# Altium PCB buck.PcbDoc
Units mm, origin at the board's own origin, x right, y up, seen from the top; angles counter-clockwise.
Board outline 15 x 15 mm, 2 copper layers (Top Layer, Bottom Layer); 13 components, 8 nets, 30 pads, 16 vias.
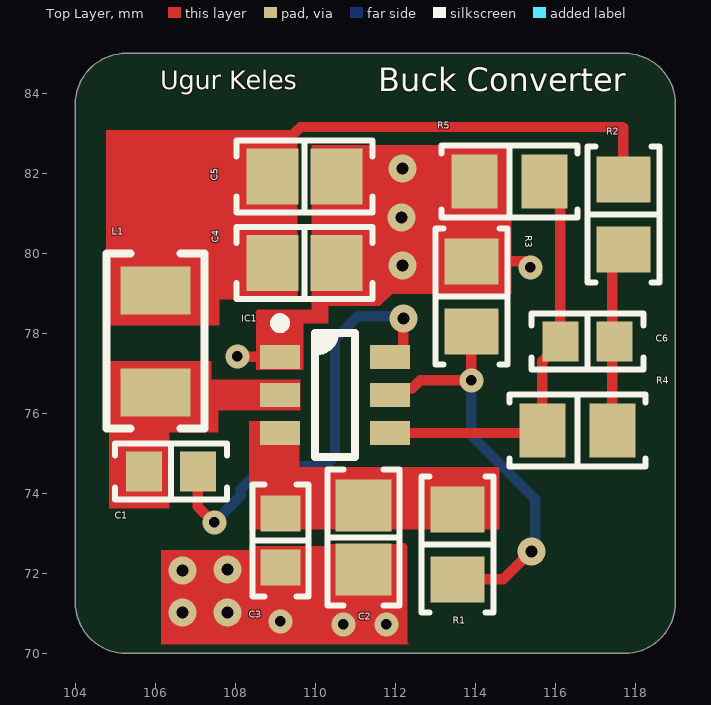
[diagram p0: Top Layer view]
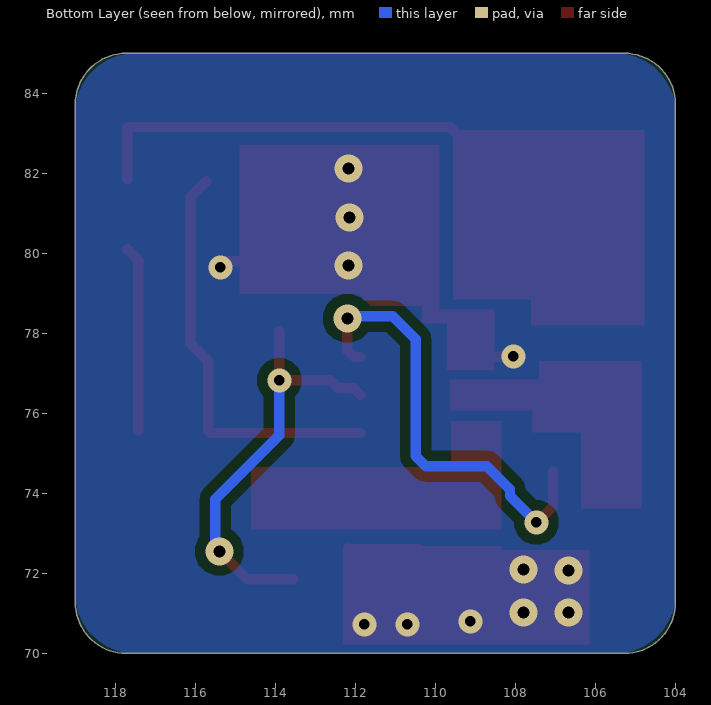
[diagram p1: Bottom Layer view, seen from below]
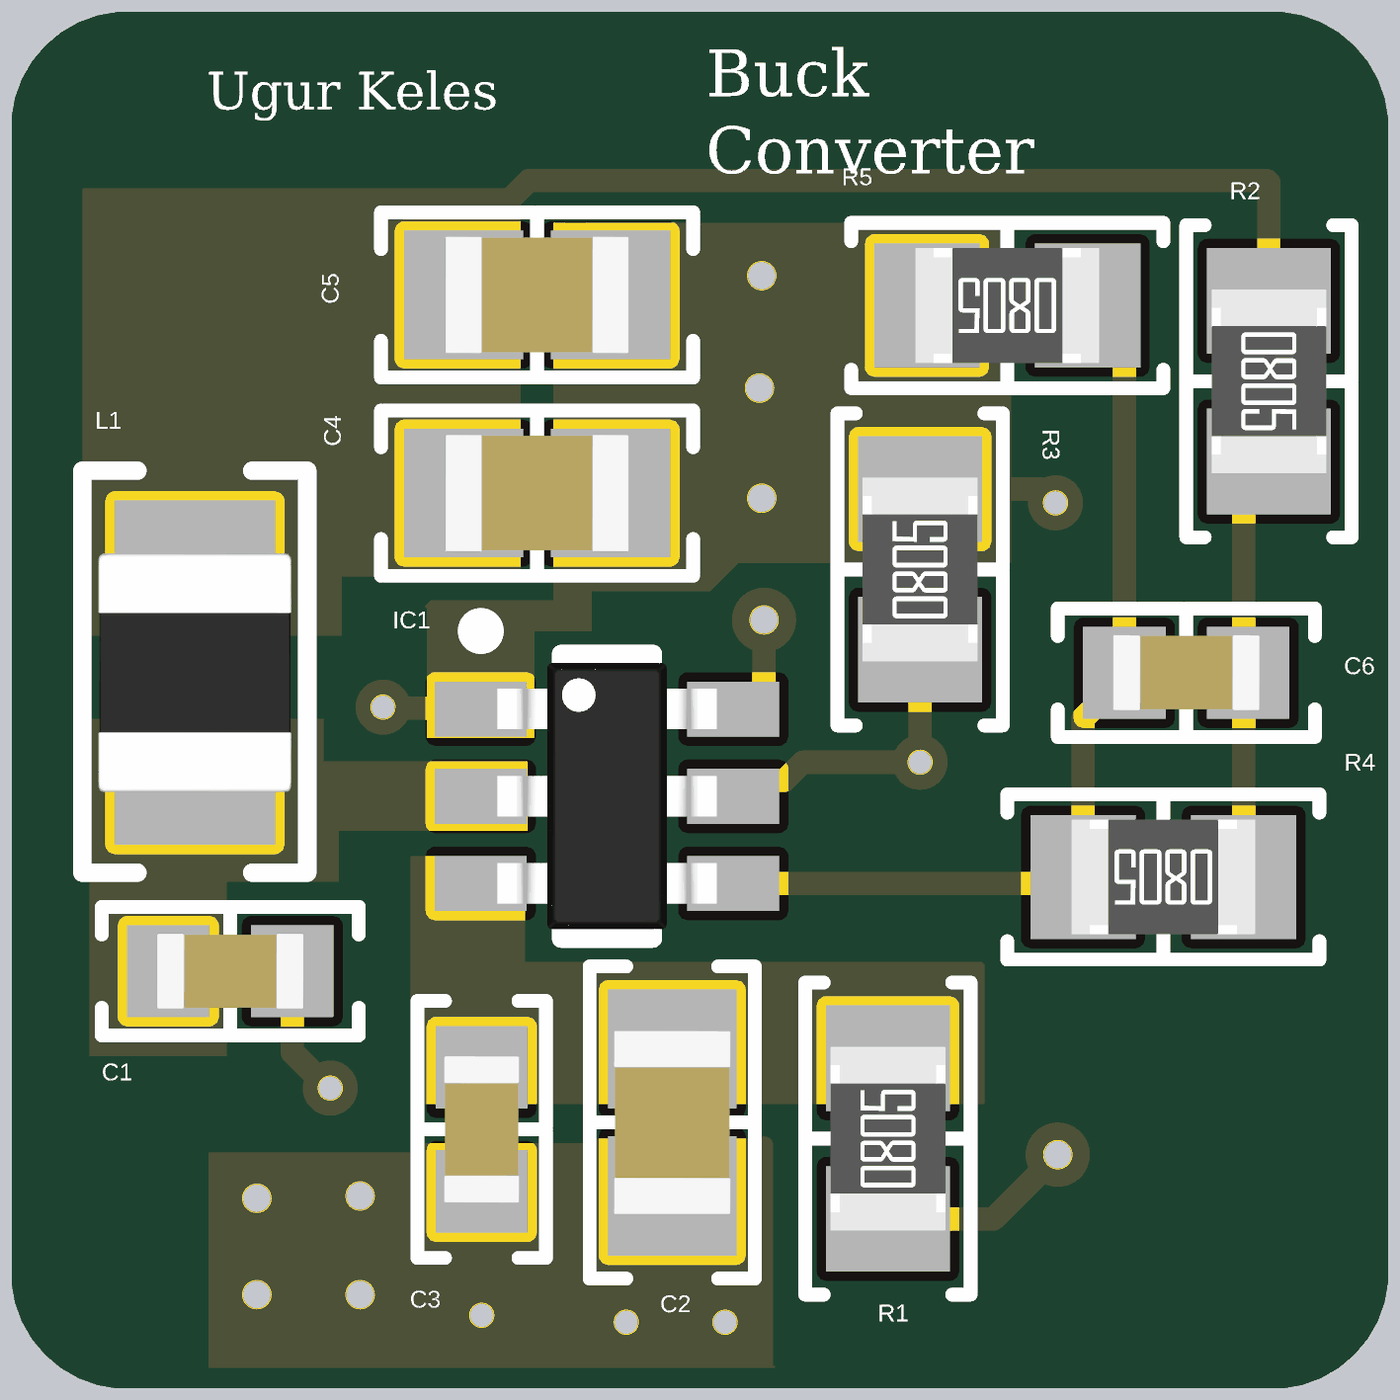
[diagram p2: 3D render of the assembled board from above, using the file's embedded part models]

## Layer stack, top to bottom
Top Solder: solder mask 0.0102, Solder Resist, Dk 3.5
Top Layer: signal copper 0.0356
Dielectric 1: dielectric 0.32, FR-4, Dk 4.8
Bottom Layer: signal copper 0.0356
Bottom Solder: solder mask 0.0102, Solder Resist, Dk 3.5

## Board outline
104,71.27 ccw(c105.27,71.27) 105.27,70 117.73,70 ccw(c117.73,71.27) 119,71.27 119,83.73 ccw(c117.73,83.73) 117.73,85 105.27,85 ccw(c105.27,83.73) 104,83.73

## Design rules (kind name [scope] priority, off if disabled: settings)
Clearance [All] p1: gap=0.254 ignorepadtopadclearanceinfootprint=FALSE except(0: Arc-Hole Track-Hole SMDPad-Hole THPad-Hole Via-Hole Fill-Hole Poly-Hole Region-Hole Text-Hole)
MinimumSolderMaskSliver [All] p1: minsoldermaskwidth=0.09
PolygonConnect [All] p1: connectstyle=Direct reliefconductorwidth=0.254 reliefentries=4 polygonreliefangle="90 Angle" airgapwidth=0.254
RoutingVias [All] p1: holewidth=0.3 width=0.7 viastyle="Through Hole" minholewidth=0.254 minwidth=0.6 maxholewidth=0.55 maxwidth=1.27
SilkToSolderMaskClearance [IsPad] p1: minsilkscreentomaskgap=0.07 clearancetoexposedcopper=TRUE
SolderMaskExpansion [All] p1: expansion=0.102 istentingtop=FALSE
Width [All] p1: maxlimit=0.254 minlimit=0.254 preferedwidth=0.254
28 further rules are at their usual default settings.

## Components (designator, comment, footprint, x,y, rotation, side; value= is the part's Value field where it differs from the comment)
C1 "100 nF" "CAP 0603_1608" 106.386,74.549 r180 top
C2 "10 µF" "CAP 0805_2012" 111.2,72.9 r90 top
C3 "100 nF" "CAP 0603_1608" 109.125,72.825 r90 top
C4 "22 µF" "CAP 0805_2012" 109.728,79.756 r180 top
C5 "22 µF" "CAP 0805_2012" 109.728,81.915 r180 top
C6 "75 pF" "CAP 0603_1608" 116.8,77.8 r0 top
IC1 "TPS54302DDCR" "TI SOT-23-6 DDC" 110.49,76.454 r0 top
L1 "10µH" "IND 1008_2520" 106,77.8 r90 top
R1 "511 kOhms" "RES 0805_2012" 113.55,72.725 r90 top
R2 "49.9 Ohms" "RES 0805_2012" 117.7,80.975 r270 top
R3 "105 kOhms" "RES 0805_2012" 113.9,78.925 r90 top
R4 "100k" "RES 0805_2012" 116.55,75.575 r180 top
R5 "13.3k" "RES 0805_2012" 114.85,81.8 r180 top

## Footprints (in the part's own frame and the unit in brackets; to place one, negate y for a bottom-side part, rotate by r counter-clockwise, add the part's x,y. Pads: shape width x height; smd on the part's side, far side on the other; paste and mask are expansions set on the pad)
"CAP 0603_1608" [mm] "Chip Capacitor, 2-Leads, Body 1.60x0.80mm, IPC Medium Density"
  rect 0.9x1 smd: 1(-0.675,0) 2(0.675,0)
  silkscreen extent -1.4,-0.7 1.4,0.7, body extent -0.8,-0.41 0.8,0.41, height 0.82
"CAP 0805_2012" [mm] "Chip Capacitor, 2-Leads, Body 2.00x1.20mm, IPC Medium Density"
  rect 1.3x1.4 smd: 1(-0.8,0) 2(0.8,0)
  silkscreen extent -1.7,-0.9 1.7,0.9, body extent -1,-0.64 1,0.64, height 1.26
"IND 1008_2520" [mm] "Chip Inductance, 2-leads, Body 2.5x2.1mm, IPC Medium Density"
  rect 1.2x1.75 smd: 1(-1.275,0) 2(1.275,0)
  silkscreen extent -2.18,-1.22 2.2,1.22, body extent -1.3,-1.05 1.3,1.05, height 1
"RES 0805_2012" [mm] "Chip Resistor, 2-Leads, Body 2.00x1.25mm, IPC Medium Density"
  rect 1.15x1.35 smd: 1(-0.875,0) 2(0.875,0)
  silkscreen extent -1.7,-0.9 1.7,0.9, body extent -1,-0.62 1,0.63, height 0.6
"TI SOT-23-6 DDC" [mm] "SOT23, 6-Leads, Body 2.90x2.80mm, Pitch 0.95mm, IPC Medium Density"
  rect 1x0.6 smd: 1(-1.375,0.95) 2(-1.375,0) 3(-1.375,-0.95) 4(1.375,-0.95) 5(1.375,0) 6(1.375,0.95)
  silkscreen extent -1.5,-1.55 0.5,1.92, body extent -1.19,-1.45 1.19,1.45, height 1

## Part data
C1 C3: library part C0603C104J4RECAUTO, "CAP CER 0603 0.1UF 16V X7R 5%", Capacitance="0.1 µF", Device Package="0603 (1608 Metric)", Manufacturer=KEMET, Operating Temperature="-55°C ~ 125°C", Ratings=AEC-Q200, Supplier Part Number 1=399-C0603C104J4RECAUTOCT-ND, Temperature Coefficient=X7R, Tolerance=±5%, Voltage - Rated=16V, Applications="Automotive, ESD Protection", ComponentLink1Description=Datasheet, ComponentLink1URL=https://connect.kemet.com:7667/gateway/IntelliData-ComponentDocumentation/1.0/download/datasheet/C0603C104J4RECAUTO, ComponentLink2Description="DigiKey Link", ComponentLink2URL=https://www.digikey.com/en/products/detail/kemet/C0603C104J4RECAUTO/8646524, LastUpdated="2/7/2024 8:09:29 PM", Lifecycle Status=Active, Minimum Order=1, Mounting Type="Surface Mount, MLCC", Package / Case="0603 (1608 Metric)", Packaging=TapeAndReel, Part Number=C0603C104J4RECAUTO, Part Status=Active, PartId=46901, Price=0.02, Series="ESD SMD Auto X7R", Size / Dimension="0.063\" L x 0.031\" W (1.60mm x 0.80mm)", Supplier 1=DigiKey, Thickness (Max)="0.034\" (0.87mm)"
C2: library part C2012X7R1A106K125AE, "CAP CER 10UF 10V X7R 0805", Device Package="0805 (2012 Metric)", Manufacturer="TDK Corporation", Operating Temperature="-55°C ~ 125°C", Supplier Part Number 1=445-173616-1-ND, Temperature Coefficient=X7R, Tolerance=±10%, Voltage - Rated=10V, Applications="Boardflex Sensitive", Capacitance="10 µF", ComponentLink1Description=Datasheet, ComponentLink1URL=https://product.tdk.com/info/en/catalog/datasheets/mlcc_commercial_soft_en.pdf?ref_disty=digikey, ComponentLink2Description="DigiKey Link", ComponentLink2URL=https://www.digikey.com/en/products/detail/tdk-corporation/C2012X7R1A106K125AE/5809181, Features="Soft Termination", LastUpdated="2/7/2024 8:15:44 PM", Lifecycle Status=Active, Minimum Order=1, Mounting Type="Surface Mount, MLCC", Package / Case="0805 (2012 Metric)", Packaging=TapeAndReel, Part Number=C2012X7R1A106K125AE, Part Status=Active, PartId=3036, Price=0.07, Series=C, Size / Dimension="0.079\" L x 0.049\" W (2.00mm x 1.25mm)", Supplier 1=DigiKey, Thickness (Max)="0.059\" (1.50mm)"
C4 C5: library part CL21A226KOQNNNG, "CAP CER 22UF 16V X5R 0805", Device Package="0805 (2012 Metric)", Manufacturer="Samsung Electro-Mechanics", Operating Temperature="-55°C ~ 85°C", Supplier Part Number 1=1276-7092-1-ND, Temperature Coefficient=X5R, Tolerance=±10%, Voltage - Rated=16V, Applications="General Purpose", Capacitance="22 µF", ComponentLink1Description=Datasheet, ComponentLink1URL=//media.digikey.com/pdf/Data%20Sheets/Samsung%20PDFs/CL21A226KOQNNNG_Spec.pdf, ComponentLink2Description="DigiKey Link", ComponentLink2URL=https://www.digikey.com/en/products/detail/samsung-electro-mechanics/CL21A226KOQNNNG/3894433, LastUpdated="2/7/2024 8:15:44 PM", Lifecycle Status=Active, Minimum Order=1, Mounting Type="Surface Mount, MLCC", Package / Case="0805 (2012 Metric)", Packaging=TapeAndReel, Part Number=CL21A226KOQNNNG, Part Status=Active, PartId=3000, Price=0.06, Series=CL, Size / Dimension="0.079\" L x 0.049\" W (2.00mm x 1.25mm)", Supplier 1=DigiKey, Thickness (Max)="0.055\" (1.40mm)"
C6: library part C0603C750K5RACAUTO, "CAP CER 75PF 50V X7R 0603", Device Package="0603 (1608 Metric)", Manufacturer=KEMET, Operating Temperature="-55°C ~ 125°C", Ratings=AEC-Q200, Supplier Part Number 1=399-C0603C750K5RACAUTOCT-ND, Temperature Coefficient=X7R, Tolerance=±10%, Voltage - Rated=50V, Applications="Automotive, Bypass, Decoupling", Capacitance="75 pF", ComponentLink1Description=Datasheet, ComponentLink1URL=https://connect.kemet.com:7667/gateway/IntelliData-ComponentDocumentation/1.0/download/datasheet/C0603C750K5RACAUTO, ComponentLink2Description="DigiKey Link", ComponentLink2URL=https://www.digikey.com/en/products/detail/kemet/C0603C750K5RACAUTO/16798108, LastUpdated="2/7/2024 8:09:21 PM", Lifecycle Status=Active, Minimum Order=1, Mounting Type="Surface Mount, MLCC", Package / Case="0603 (1608 Metric)", Packaging=TapeAndReel, Part Number=C0603C750K5RACAUTO, Part Status=Active, PartId=48229, Price=0.04, Series="SMD Auto X7R", Size / Dimension="0.063\" L x 0.031\" W (1.60mm x 0.80mm)", Supplier 1=DigiKey, Thickness (Max)="0.034\" (0.87mm)"
IC1: library part TPS54302DDCT, "IC REG BUCK ADJ 3A TSOT23-6", Current - Output=3A, Device Package="SOT-23-6 Thin, TSOT-23-6", Frequency - Switching=400kHz, Manufacturer="Texas Instruments", Operating Temperature="-40°C ~ 125°C (TJ)", Supplier Device Package=TSOT-23-6, Supplier Part Number 1=296-44542-1-ND, Voltage - Input (Max)=28V, Voltage - Input (Min)=4.5V, Voltage - Output (Min/Fixed)=0.596V, ComponentLink1Description=Datasheet, ComponentLink1URL=http://www.ti.com/general/docs/suppproductinfo.tsp?distId=10&gotoUrl=http%3A%2F%2Fwww.ti.com%2Flit%2Fgpn%2Ftps54302, ComponentLink2Description="DigiKey Link", ComponentLink2URL=http://digikey.com/product-detail/en/texas-instruments/TPS54302DDCT/296-44542-1-ND/6128450, Function=Step-Down, LastUpdated="2/4/2020 2:31:43 PM", Lifecycle Status=Active, Minimum Order=1, Mounting Type="Surface Mount", Number of Outputs=1, Output Configuration=Positive, Output Type=Adjustable, Package / Case="SOT-23-6 Thin, TSOT-23-6", Packaging=TapeAndReel, Part Number=TPS54302DDCT, Part Status=Active, Price=1.06, Series=-, Supplier 1=DigiKey, Synchronous Rectifier=Yes, Topology=Buck, Voltage - Output (Max)=28V
L1: library part 1269AS-H-100N=P2, "FIXED IND 10UH 1A 689 MOHM SMD", Current Rating (Amps)=1A, DC Resistance (DCR)="689mOhm Max", Device Package="1008 (2520 Metric)", Inductance Frequency - Test=1MHz, Manufacturer="Murata Electronics", Operating Temperature="-40°C ~ 85°C", Part Number=1269AS-H-100N=P2, Supplier Part Number 1=490-10572-1-ND, Tolerance=±30%, ComponentLink1Description=Datasheet, ComponentLink1URL=https://search.murata.co.jp/Ceramy/image/img/P02/J(E)TE243A-0004_DFE252010C_reference.pdf, ComponentLink2Description="DigiKey Link", ComponentLink2URL=http://digikey.com/product-detail/en/murata-electronics/1269AS-H-100N=P2/490-10572-1-ND/5272028, Height - Seated (Max)="0.039\" (1.00mm)", Inductance=10µH, LastUpdated="9/2/2020 1:29:15 AM", Lifecycle Status=Active, Material - Core="Iron Powder", Minimum Order=1, Mounting Type="Surface Mount", Package / Case="1008 (2520 Metric)", Packaging=TapeAndReel, Part Status=Active, PartId=3455, Price=0.14, Series=DFE252010C, Shielding=Shielded, Size / Dimension="0.098\" L x 0.079\" W (2.50mm x 2.00mm)", Supplier 1=DigiKey, Supplier Device Package="1008 (2520 Metric)", Type=Wirewound
R1: library part ERJ-PB6D5113V, "RES SMD 511K OHM 0.5% 1/4W 0805", Device Package="0805 (2012 Metric)", Manufacturer="Panasonic Electronic Components", Operating Temperature="-55°C ~ 155°C", Power (Watts)="0.25W, 1/4W", Ratings=AEC-Q200, Supplier Device Package=0805, Supplier Part Number 1=P21328CT-ND, Temperature Coefficient=±50ppm/°C, Tolerance=±0.5%, ComponentLink1Description=Datasheet, ComponentLink1URL=https://industrial.panasonic.com/cdbs/www-data/pdf/RDM0000/AOA0000C328.pdf, ComponentLink2Description="DigiKey Link", ComponentLink2URL=https://www.digikey.com/en/products/detail/panasonic-electronic-components/ERJ-PB6D5113V/6214111, Composition="Thick Film", Features="Automotive AEC-Q200, Pulse Withstanding", Height - Seated (Max)="0.028\" (0.70mm)", LastUpdated="2/7/2024 9:01:00 PM", Lifecycle Status=Active, Minimum Order=1, Number of Terminations=2, Package / Case="0805 (2012 Metric)", Packaging=TapeAndReel, Part Number=ERJ-PB6D5113V, Part Status=Active, PartId=30962, Price=0.02, Resistance="511 kOhms", Series=ERJ-PB6, Size / Dimension="0.079\" L x 0.049\" W (2.00mm x 1.25mm)", Supplier 1=DigiKey
R2 R3 R4 R5: library part ERJ-PB6D5113V, "RES SMD 511K OHM 0.5% 1/4W 0805", Device Package="0805 (2012 Metric)", Manufacturer="Panasonic Electronic Components", Operating Temperature="-55°C ~ 155°C", Power (Watts)="0.25W, 1/4W", Ratings=AEC-Q200, Resistance="511 kOhms", Supplier Device Package=0805, Supplier Part Number 1=P21328CT-ND, Temperature Coefficient=±50ppm/°C, Tolerance=±0.5%, ComponentLink1Description=Datasheet, ComponentLink1URL=https://industrial.panasonic.com/cdbs/www-data/pdf/RDM0000/AOA0000C328.pdf, ComponentLink2Description="DigiKey Link", ComponentLink2URL=https://www.digikey.com/en/products/detail/panasonic-electronic-components/ERJ-PB6D5113V/6214111, Composition="Thick Film", Features="Automotive AEC-Q200, Pulse Withstanding", Height - Seated (Max)="0.028\" (0.70mm)", LastUpdated="2/7/2024 9:01:00 PM", Lifecycle Status=Active, Minimum Order=1, Number of Terminations=2, Package / Case="0805 (2012 Metric)", Packaging=TapeAndReel, Part Number=ERJ-PB6D5113V, Part Status=Active, PartId=30962, Price=0.02, Series=ERJ-PB6, Size / Dimension="0.079\" L x 0.049\" W (2.00mm x 1.25mm)", Supplier 1=DigiKey

## Via types
v1: diameter 0.7, hole 0.3, Top Layer to Bottom Layer, tented both sides, 9 vias
v2: diameter 0.6, hole 0.254, Top Layer to Bottom Layer, tented both sides, 7 vias

## Nets (pads, with @x,y where several pads share a name; then routed paths per layer and width w, separated by ;. In a path a pad name is that pad's centre, name@x,y a point inside that pad or via, vN(x,y) a via of type N, cw(c..) or ccw(c..) an arc to the next point about the centre after c; other vN are vias at no path point)
BOOT: C1.1 IC1.6 | length 11.3
  Top Layer w0.254: C1.1 107.061,73.668 107.454,73.275 v2(107.475,73.275) ; IC1.6 112.027,77.404 112.2,77.577 v1(112.2,78.375)
  Bottom Layer w0.254: v2(107.475,73.275) 108.136,73.936 108.136,74.1 108.712,74.676 110.236,74.676 110.49,74.93 110.49,77.851 111.064,78.425 112.15,78.425 v1(112.2,78.375)
CFF: C6.2 R2.2 R4.1 | length 4.6
  Top Layer w0.254: R4.1 117.425,79.825 R2.2
EN: IC1.5 R1.1 R3.1 | length 10.5
  Top Layer w0.254: IC1.5 112.038,76.627 112.427,76.627 112.625,76.825 v2(113.9,76.825) R3.1 ; R1.1 114.7,71.85 v1(115.4,72.55)
  Bottom Layer w0.254: v2(113.9,76.825) 113.9,75.45 115.5,73.85 115.5,72.75 115.4,72.65 v1(115.4,72.55)
FB: C6.1 IC1.4 R4.2 R5.1 | length 10.4
  Top Layer w0.254: IC1.4 115.604,75.504 R4.2 115.675,77.3 116.125,77.75 C6.1 116.125,81.4 R5.1
GND: C2.1 C3.1 C4.1 C5.1 IC1.1 R3.2 R5.2 | length 2.7
  Top Layer w0.254: v1(107.8,72.1) cw(c107.85,72.1) v1@107.85,72.15 ; v2(108.05,77.425) 108.06,77.415 109.104,77.415 IC1.1 ; R3.2 115.225,79.8 cw(c115.225,79.65) v2(115.375,79.65)
  other v1: 106.675,71.025 107.8,71.025 106.675,72.075 112.175,79.7 112.15,80.9 112.175,82.125
  other v2: 110.7,70.725 111.775,70.725 109.125,70.8
SW: C1.2 IC1.2 L1.1
Vin: C2.2 C3.2 IC1.3 R1.2
Vout: C4.2 C5.2 L1.2 R2.1 | length 9.8
  Top Layer w0.254: 109.322,82.931 109.406,82.931 109.55,83.075 109.635,83.16 117.678,83.16 117.7,83.138 R2.1

## Polygon pours and split planes (outlines as drawn)
GND on Bottom Layer "GND_L02_P000" (solid, pour order 0): 104,83.5 cw(c105.5,83.5) 105.5,85 117.5,85 cw(c117.5,83.5) 119,83.5 119,71.5 cw(c117.5,71.5) 117.5,70 105.5,70 cw(c105.5,71.5) 104,71.5

## Other copper
Top Layer:
  region net GND: 112.325,70.25 cw(c112.3,70.25) 112.3,70.225 106.15,70.225 106.15,72.575 108.35,72.575 108.35,72.675 108.4,72.675 108.45,72.675 110.3,72.675 ccw(c110.312,72.738) 110.375,72.725 112.134,72.725 cw(c112.2,72.65) 112.3,72.65 112.3,70.25
  region net GND: 109.7,77.089 109.7,78.25 110.325,78.25 110.325,78.689 111.614,78.689 111.919,78.994 114.894,78.994 114.894,82.702 109.906,82.702 109.906,78.588 108.563,78.588 108.5,78.525 108.525,78.5 108.525,77.089
  region net Vout: 109.55,78.85 107.6,78.85 107.6,78.2 104.775,78.2 104.775,83.075 109.55,83.075
  region net Vin: 108.35,75.8 108.35,73.1 114.6,73.1 114.6,74.625 114.575,74.65 109.6,74.65 109.6,75.8
  region net SW: 109.625,76.075 107.569,76.075 107.569,75.525 106.35,75.525 106.35,73.625 104.85,73.625 104.85,77.3 107.4,77.3 107.4,76.835 109.625,76.835

## Silkscreen, mask and mechanical layers (free items; w line width, h text height)
Top Overlay:
  text "Ugur Keles" at 106.125,83.937 h0.8
  text "Buck Converter" at 111.575,83.85 h1